# Altium PCB MecaVac.PcbDoc (part 1 of 2)
Units mm, origin at the board's own origin, x right, y up, seen from the top; angles counter-clockwise.
Board outline 120 x 80 mm, 2 copper layers (Top Layer, Bottom Layer), stack 1.56 mm thick; 93 components, 53 nets, 292 pads, 63 vias.
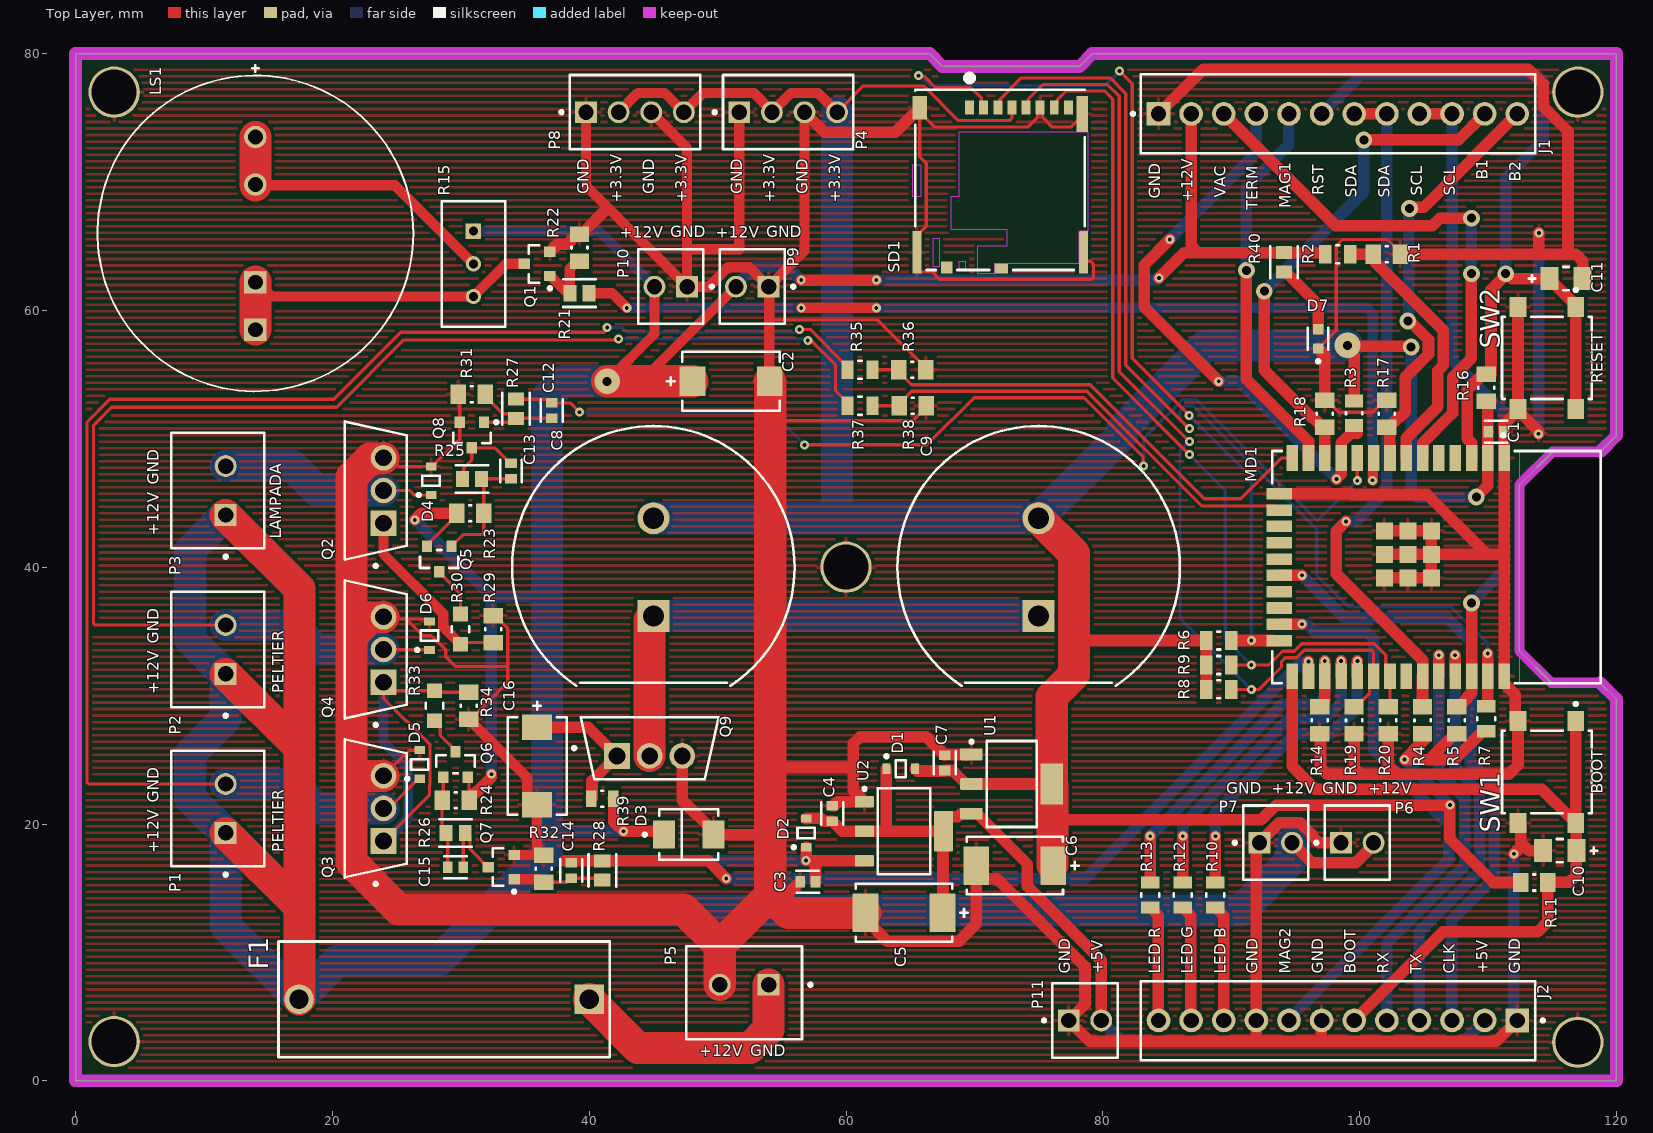
[diagram p0: Top Layer view]
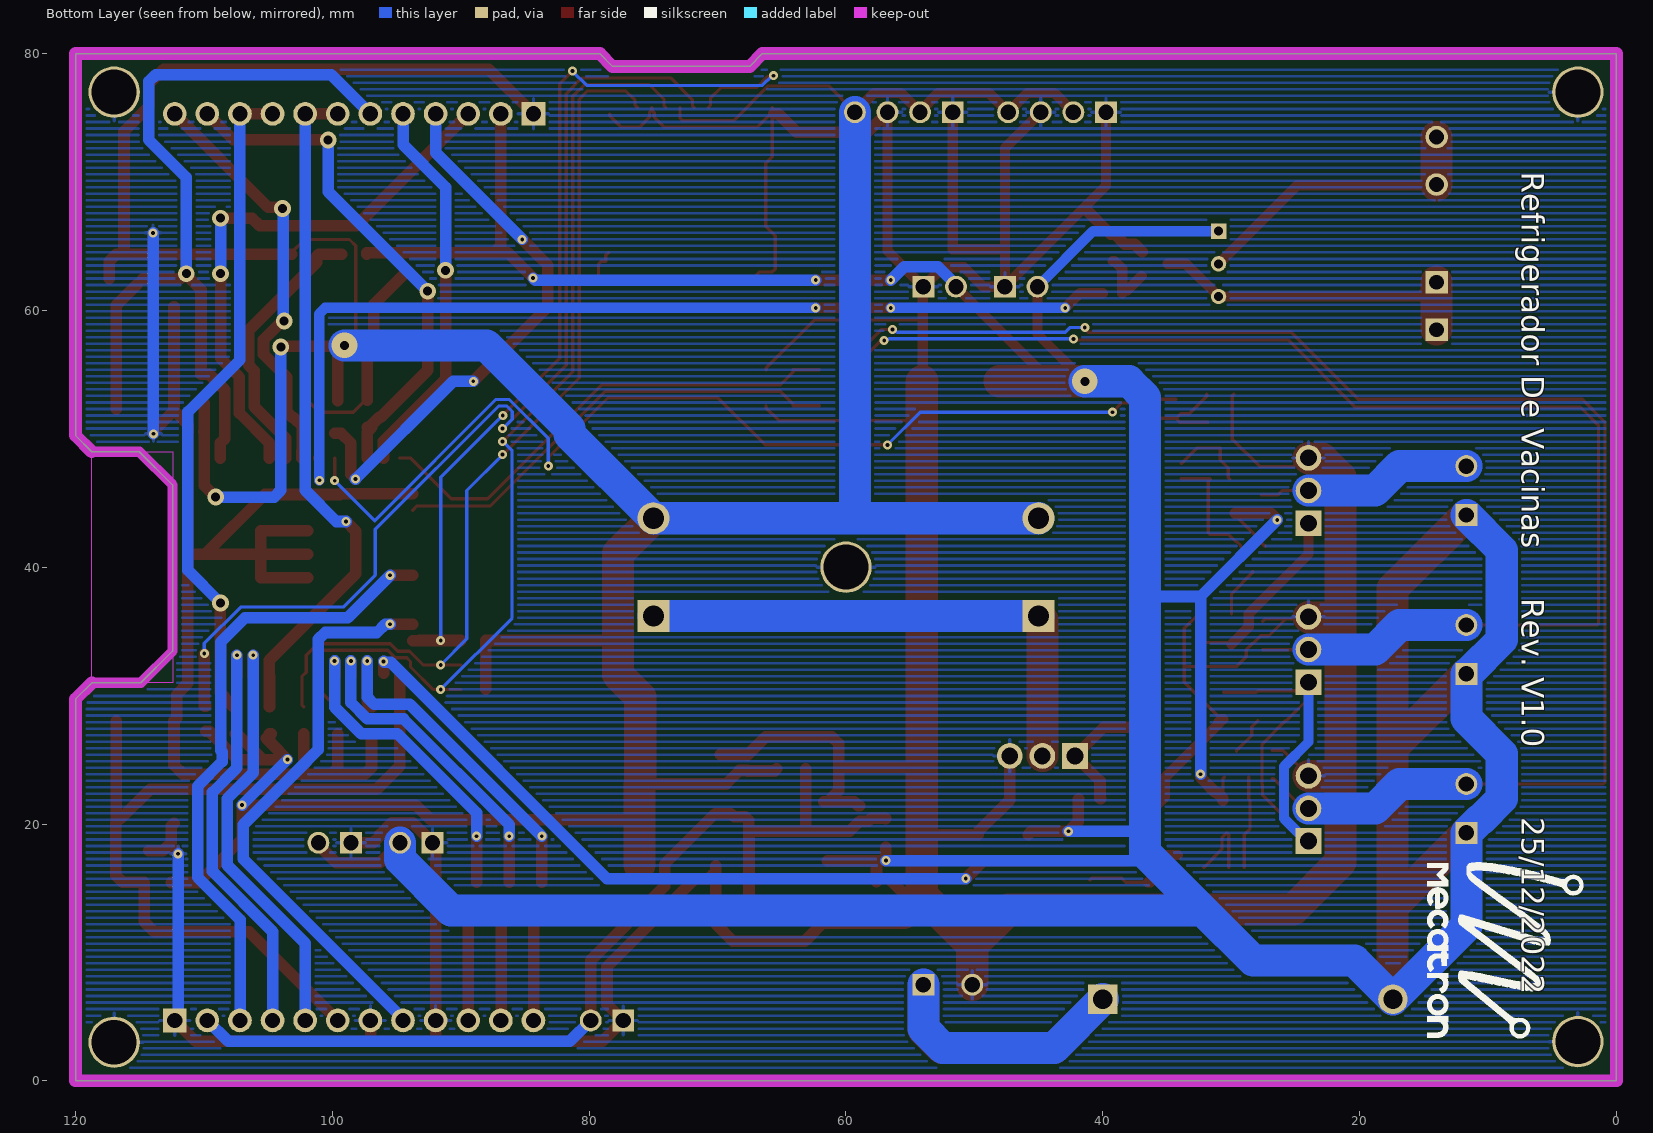
[diagram p1: Bottom Layer view, seen from below]
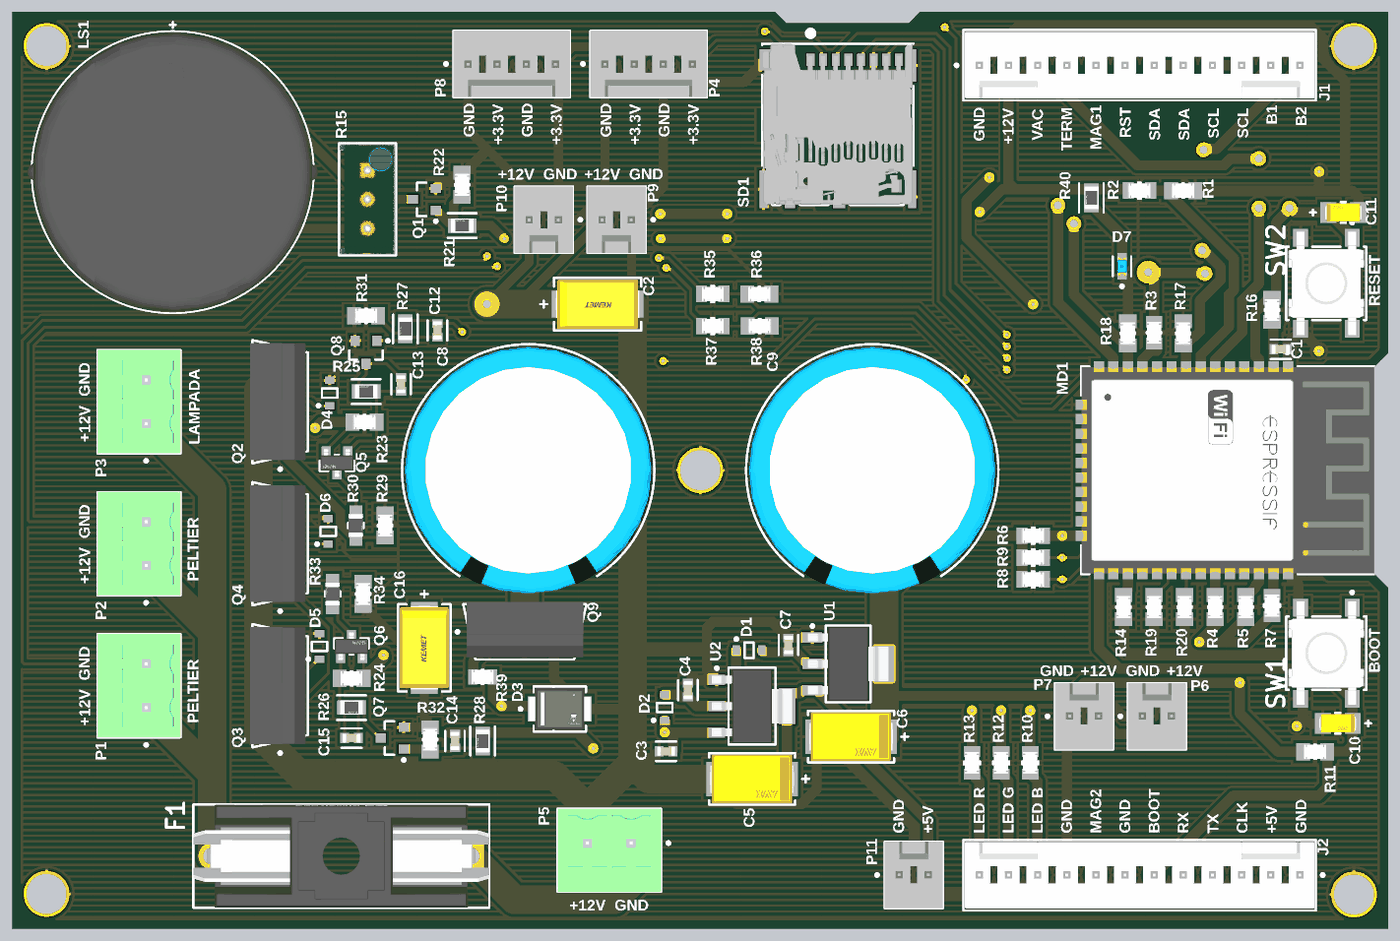
[diagram p3: 3D render of the assembled board from above, using the file's embedded part models]

## Layer stack, top to bottom
Top Solder: solder mask 0.02, Solder Resist, Dk 3.5
Top Layer: signal copper 0.3
Dielectric 1: dielectric 0.96, FR-4, Dk 4.8
Bottom Layer: signal copper 0.3
Bottom Solder: solder mask 0.02, Solder Resist, Dk 3.5

## Board outline
112.45,33.473 114.923,31 118.733,31 120,29.733 120,0 0,0 0,80 66.523,80 67.494,79 78.194,79 79.172,80 120,80 120,50.25 118.75,49 115.04,49 112.45,46.41

## Design rules (kind name [scope] priority, off if disabled: settings)
Clearance [All] p1: gap=0.254 ignorepadtopadclearanceinfootprint=FALSE except(0: Arc-Hole Track-Hole SMDPad-Hole THPad-Hole Via-Hole Fill-Hole Poly-Hole Region-Hole Text-Hole)
PolygonConnect [All] p1: connectstyle=Relief reliefconductorwidth=0.254 reliefentries=4 polygonreliefangle="90 Angle" airgapwidth=0.254
RoutingVias [All] p1: holewidth=1 width=1.3 viastyle="Through Hole" minholewidth=0.3 minwidth=0.7 maxholewidth=2 maxwidth=3
SolderMaskExpansion [All] p1: expansion=0.102 istentingtop=FALSE
Width [All] p1: maxlimit=2.5 minlimit=0.254 preferedwidth=0.9 minimp=50.000000 maximp=50.000000 favimp=50.000000
30 further rules are at their usual default settings.

## Components (designator, comment, footprint, x,y, rotation, side; value= is the part's Value field where it differs from the comment)
C1 "C0603C471J5GACTU" FP-C0603C-CF-MFG 110.617,50.546 r0 top value="470 pF"
C2 "T491D476K025AT" FP-T491D476K025AT-MFG 51.054,54.483 r180 top
C3 "C0603C471J5GACTU" FP-C0603C-CF-MFG 57.023,15.494 r180 top value="470 pF"
C4 "C0603C471J5GACTU" FP-C0603C-CF-MFG 58.928,20.828 r90 top value="470 pF"
C5 "47uF" FP-TAJD-MFG 64.516,13.081 r0 top
C6 "47uF" FP-TAJD-MFG 73.152,16.764 r0 top
C7 "C0603C471J5GACTU" FP-C0603C-CF-MFG 67.691,24.765 r90 top value="470 pF"
C8 "Super Capacitor 1F 5.5V" FP-FR0H105ZF-MFG 45,40 r90 top value=1F
C9 "1F" FP-FR0H105ZF-MFG 75,40 r90 top
C10 "TAJA104K035RNJ" FP-TAJA-MFG 115.595,17.932 r0 top
C11 "TAJA104K035RNJ" FP-TAJA-MFG 116.078,62.484 r180 top
C12 "C0603C471J5GACTU" FP-C0603C-CF-MFG 37.084,52.197 r270 top value="470 pF"
C13 "C0603C471J5GACTU" FP-C0603C-CF-MFG 33.909,47.498 r90 top value="470 pF"
C14 "C0603C471J5GACTU" FP-C0603C-CF-MFG 38.608,16.383 r270 top value="470 pF"
C15 "C0603C471J5GACTU" FP-C0603C-CF-MFG 29.591,16.637 r0 top value="470 pF"
C16 "T491D476K025AT" FP-T491D476K025AT-MFG 35.941,24.511 r90 top
D1 "BAT54HT1G" ONSC-SOD-323-2-477-02_V 64.262,24.307 r0 top
D2 "BAT54HT1G" ONSC-SOD-323-2-477-02_V 56.896,19.304 r90 top
D3 "TVS-15V" FP-95401-MFG 47.752,19.177 r0 top
D4 "BAT54HT1G" ONSC-SOD-323-2-477-02_V 27.686,46.736 r90 top
D5 "BAT54HT1G" ONSC-SOD-323-2-477-02_V 26.797,24.638 r90 top
D6 "BAT54HT1G" ONSC-SOD-323-2-477-02_V 27.559,34.671 r90 top
D7 "LTST-C191TBKT" FP-LTST-C191TBKT-MFG 96.774,57.785 r90 top
F1 "64600001223" FP-64600001223-MFG 28.702,6.35 r180 top
J1 "22-27-2121" FP-22-27-2121-MFG 98.313,75.331 r180 top
J2 "22-27-2121" FP-22-27-2121-MFG 98.313,4.679 r0 top
LS1 "PKB24SPCH3601-B0" FP-PKB24SPCH3601-B0-MFG 14,66 r90 top
MD1 "ESP32-WROOM-32D" FP-ESP32-WROOM-32D-MFG 106,40 r270 top
P1 "Peltier 1" PHOE-1803426_V 11.684,21.209 r90 top
P2 "Peltier 2" PHOE-1803426_V 11.684,33.591 r90 top
P3 "Lâmpada" PHOE-1803426_V 11.684,45.974 r90 top
P4 "22-27-2041" MOLX-22-27-2041_V 55.499,75.438 r180 top
P5 "Power" PHOE-1803426_V 52.07,7.483 r180 top
P6 "22-27-2021" MOLX-22-27-2021_V 99.822,18.542 r0 top
P7 "22-27-2021" MOLX-22-27-2021_V 93.472,18.542 r0 top
P8 "22-27-2041" MOLX-22-27-2041_V 43.561,75.438 r180 top
P9 "22-27-2021" MOLX-22-27-2021_V 52.705,61.849 r180 top
P10 "22-27-2021" MOLX-22-27-2021_V 46.355,61.849 r180 top
P11 "22-27-2021" MOLX-22-27-2021_V 78.613,4.699 r0 top
Q1 "BC846BLT1G" ONSC-SOT-23-3-318-08_V 35.941,63.627 r180 top
Q2 "IRF1404PBF" FP-PG-TO220-3-MFG 23.368,45.974 r180 top
Q3 "IRF1404PBF" FP-PG-TO220-3-MFG 23.368,21.209 r180 top
Q4 "IRF1404PBF" FP-PG-TO220-3-MFG 23.368,33.591 r180 top
Q5 "BC807-40-7-F" FP-SOT23-MFG 28.321,40.64 r270 top
Q6 "BC807-40-7-F" FP-SOT23-MFG 29.591,24.638 r90 top
Q7 "BC846BLT1G" ONSC-SOT-23-3-318-08_V 33.147,16.637 r180 top
Q8 "BC846BLT1G" ONSC-SOT-23-3-318-08_V 30.861,50.292 r270 top
Q9 "IRF1404PBF" FP-PG-TO220-3-MFG 44.704,25.908 r90 top
R1 "CRCW080510K0FKEA" FP-CRCW0805-e3-IPC_A 102.108,64.389 r0 top
R2 "CRCW0805100KFKEA" FP-CRCW0805-e3-MFG 98.298,64.389 r0 top
R3 "CRCW08054K70FKEA" FP-CRCW0805-e3-IPC_B 99.568,51.997 r270 top
R4 "CRCW080510K0FKEA" FP-CRCW0805-e3-IPC_A 104.902,28.067 r90 top
R5 "CRCW080510K0FKEA" FP-CRCW0805-e3-IPC_A 107.569,28.067 r90 top
R6 "CRCW080547K0FKEA" FP-CRCW0805-e3-MFG 89.027,34.29 r0 top
R7 "CRCW080547K0FKEA" FP-CRCW0805-e3-MFG 109.855,28.194 r90 top
R8 "CRCW080547K0FKEA" FP-CRCW0805-e3-MFG 89.027,30.48 r0 top
R9 "CRCW080547K0FKEA" FP-CRCW0805-e3-MFG 89.027,32.385 r0 top
R10 "CRCW0805220RFKEA" FP-CRCW0805-e3-MFG 88.773,14.478 r270 top
R11 "CRCW080510K0FKEA" FP-CRCW0805-e3-IPC_A 113.614,15.443 r180 top
R12 "CRCW0805220RFKEA" FP-CRCW0805-e3-MFG 86.233,14.478 r270 top
R13 "CRCW0805220RFKEA" FP-CRCW0805-e3-MFG 83.693,14.478 r270 top
R14 "CRCW080510K0FKEA" FP-CRCW0805-e3-IPC_A 96.901,28.067 r90 top
R15 "3296W-1-202LF" FP-3296W-MFG 30.988,63.627 r180 top
R16 "CRCW080510K0FKEA" FP-CRCW0805-e3-IPC_A 109.855,53.975 r270 top
R17 "CRCW080510K0FKEA" FP-CRCW0805-e3-IPC_A 102.108,51.943 r270 top
R18 "CRCW080510K0FKEA" FP-CRCW0805-e3-IPC_A 97.282,51.943 r270 top
R19 "CRCW080510K0FKEA" FP-CRCW0805-e3-IPC_A 99.568,28.067 r90 top
R20 "CRCW080510K0FKEA" FP-CRCW0805-e3-IPC_A 102.235,28.067 r90 top
R21 "ERA6AEB102V" FP-ERA6A-IPC_C 39.243,61.341 r180 top
R22 "CRCW080510K0FKEA" FP-CRCW0805-e3-IPC_A 39.243,64.897 r90 top
R23 "CRCW080510K0FKEA" FP-CRCW0805-e3-IPC_A 30.734,44.196 r0 top
R24 "CRCW080510K0FKEA" FP-CRCW0805-e3-IPC_A 29.591,21.844 r180 top
R25 "ERA6AEB102V" FP-ERA6A-IPC_C 30.872,46.863 r180 top
R26 "ERA6AEB102V" FP-ERA6A-IPC_C 29.591,19.304 r0 top
R27 "ERA6AEB102V" FP-ERA6A-IPC_C 34.29,52.335 r270 top
R28 "ERA6AEB102V" FP-ERA6A-IPC_C 41.021,16.383 r270 top
R29 "CRCW080510K0FKEA" FP-CRCW0805-e3-IPC_A 32.512,35.179 r90 top
R30 "ERJ-6GEYJ151V" FP-ERJ6GE-MFG 29.972,35.179 r270 top value=150Ω
R31 "CRCW080510K0FKEA" FP-CRCW0805-e3-IPC_A 30.861,53.467 r0 top
R32 "CRCW080510K0FKEA" FP-CRCW0805-e3-IPC_A 36.449,16.51 r270 top
R33 "ERJ-6GEYJ151V" FP-ERJ6GE-MFG 27.94,29.21 r90 top value=150Ω
R34 "CRCW080510K0FKEA" FP-CRCW0805-e3-IPC_A 30.607,29.21 r270 top
R35 "CRCW0805100KFKEA" FP-CRCW0805-e3-MFG 61.087,55.372 r0 top
R36 "CRCW080510K0FKEA" FP-CRCW0805-e3-IPC_A 65.151,55.372 r0 top
R37 "CRCW0805100KFKEA" FP-CRCW0805-e3-MFG 61.087,52.578 r0 top
R38 "CRCW080510K0FKEA" FP-CRCW0805-e3-IPC_A 65.186,52.578 r0 top
R39 "CRCW0805220KFKEA" FP-CRCW0805-e3-IPC_C 41.021,21.971 r0 top
R40 "ERA6AEB102V" FP-ERA6A-IPC_C 94.107,63.754 r270 top
SD1 "503398-1892" MOLX-503398-1892_V 72,69.53 r0 top
SW1 "BOOT" FP-B3S-1000P-MFG 114.59,24.046 r270 top
SW2 "RESET" FP-B3S-1000P-MFG 114.59,56.299 r270 top
U1 "LM1117IMP-3.3/NOPB" DCY0004A_N 72.898,23.114 r0 top
U2 "LM1117MPX-5.0/NOPB" DCY0004A_L 64.516,19.431 r0 top

## Footprints (in the part's own frame and the unit in brackets; to place one, negate y for a bottom-side part, rotate by r counter-clockwise, add the part's x,y. Pads: shape width x height; smd on the part's side, far side on the other; paste and mask are expansions set on the pad)
DCY0004A_L [mm] "SOT223, 4-Leads, Body 6.7x3.7mm, Pitch 2.3mm, IPC High Density"
  rrect11% 1.45x0.9 smd: 1(-3.075,2.3) 2(-3.075,0) 3(-3.075,-2.3)
  rrect7% 1.45x3.15 smd: 4(3.075,0)
  silkscreen extent -3.2,-3.35 2.05,3.42, body extent -3.5,-3.25 3.5,3.25, height 1.62
DCY0004A_N [mm] "SOT223, 4-Leads, Body 6.7x3.7mm, Pitch 2.3mm, IPC Medium Density"
  rrect11% 1.75x0.9 smd: 1(-3.125,2.3) 2(-3.125,0) 3(-3.125,-2.3)
  rrect6% 1.75x3.2 smd: 4(3.125,0)
  silkscreen extent -3.25,-3.35 1.95,3.42, body extent -3.5,-3.25 3.5,3.25, height 1.62
FP-22-27-2121-MFG [mm]
  rect 1.84x1.84 hole 1.19 paste-1000 mask+0: 1(13.97,0.02)
  round 1.84 hole 1.19 paste-1000 mask+0: 2(11.43,0.02) 3(8.89,0.02) 4(6.35,0.02) 5(3.81,0.02) 6(1.27,0.02) 7(-1.27,0.02) 8(-3.81,0.02) 9(-6.35,0.02) 10(-8.89,0.02) 11(-11.43,0.02) 12(-13.97,0.02)
  silkscreen extent -15.37,-3.08 16.09,3.08, body extent -15.47,-3.18 15.47,3.18, height 0.25
FP-3296W-MFG [mm]
  rect 1.2x1.2 hole 0.7 paste-1000 mask+0: 1(0.005,-2.54)
  round 1.2 hole 0.7 paste-1000 mask+0: 2(0.005,0) 3(0.005,2.54)
  silkscreen extent -2.48,-4.89 2.48,4.89, body extent -2.58,-4.99 2.58,4.99, height 0.25
FP-95401-MFG [mil]
  rect 67.5x86 smd paste+0 mask+0: 1(-76.25,0) 2(76.25,0)
  silkscreen extent -140,-78 90,78, body extent -114,-81 114,81, height 10
FP-64600001223-MFG [mm]
  rect 2.3x2.3 hole 1.5 paste-1000 mask+0: 1(-11.3,0)
  round 2.3 hole 1.5 paste-1000 mask+0: 2(11.3,0)
  silkscreen extent -12.9,-4.5 12.9,4.5, body extent -13,-4.6 13,4.6, height 0.25
FP-B3S-1000P-MFG [mm]
  rect 1.55x1.3 smd paste+0 mask+0: 1(-3.975,2.25) 2(3.975,2.25) 3(-3.975,-2.25) 4(3.975,-2.25)
  silkscreen extent -5.42,-3.5 3.2,3.5, body extent -4.85,-3.6 4.85,3.6, height 0.25
FP-C0603C-CF-MFG [mm]
  rect 0.75x0.9 smd paste+0 mask+0: 1(-0.6,0) 2(0.6,0)
  silkscreen extent -0.87,-0.85 0.88,0.85, body extent -1.2,-0.6 1.2,0.6, height 0.25
FP-CRCW0805-e3-IPC_A [mil]
  rect 47.5x59.38 smd paste+0 mask+0: 1(-41.37,0) 2(41.37,0)
  silkscreen extent -3,-25 3,25, body extent -85,-49 85,49, height 10
FP-CRCW0805-e3-IPC_B [mm]
  rect 1.007x1.408 smd paste+0 mask+0: 1(-0.951,0) 2(0.951,0)
  silkscreen extent -0.07,-0.63 0.07,0.63, body extent -1.7,-0.95 1.7,0.95, height 0.25
FP-CRCW0805-e3-IPC_C [mil]
  rect 31.75x51.5 smd paste+0 mask+0: 1(-33.5,0) 2(33.5,0)
  silkscreen extent -3,-25 3,25, body extent -53,-31 53,31, height 10
FP-CRCW0805-e3-MFG [mm]
  rect 0.95x1.45 smd paste+0 mask+0: 1(-0.975,0) 2(0.975,0)
  silkscreen extent -0.13,-0.7 0.13,0.7, body extent -1.55,-0.82 1.55,0.82, height 0.25
FP-ERA6A-IPC_C [mm]
  rect 1.005x1.262 smd paste+0 mask+0: 1(-0.751,0) 2(0.751,0)
  silkscreen extent -1.25,-1.07 1.25,1.07, body extent -1.35,-0.77 1.35,0.77, height 0.25
FP-ERJ6GE-MFG [mm]
  rect 1.15x1.15 smd paste+0 mask+0: 1(-1.175,0) 2(1.175,0)
  silkscreen extent -0.23,-0.67 0.22,0.67, body extent -1.85,-0.77 1.85,0.77, height 0.25
FP-ESP32-WROOM-32D-MFG [mm]
  rect 2x0.9 smd paste+0 mask+0: 1(-8.5,5.26) 2(-8.5,3.99) 3(-8.5,2.72) 4(-8.5,1.45) 5(-8.5,0.18) 6(-8.5,-1.09) 7(-8.5,-2.36) 8(-8.5,-3.63) 9(-8.5,-4.9) 10(-8.5,-6.17) 11(-8.5,-7.44) 12(-8.5,-8.71) 13(-8.5,-9.98) 14(-8.5,-11.25) 25(8.5,-11.25) 26(8.5,-9.98) 27(8.5,-8.71) 28(8.5,-7.44) 29(8.5,-6.17) 30(8.5,-4.9) 31(8.5,-3.63) 32(8.5,-2.36) 33(8.5,-1.09) 34(8.5,0.18) 35(8.5,1.45) 36(8.5,2.72) 37(8.5,3.99) 38(8.5,5.26)
  rect 0.9x2 smd paste+0 mask+0: 15(-5.715,-12.25) 16(-4.445,-12.25) 17(-3.175,-12.25) 18(-1.905,-12.25) 19(-0.635,-12.25) 20(0.635,-12.25) 21(1.905,-12.25) 22(3.175,-12.25) 23(4.445,-12.25) 24(5.715,-12.25)
  rect 1.33x1.33 smd paste+0 mask+0: 39(-2.835,-0.405) 39(-2.835,-2.24) 39(-2.835,-4.075) 39(-1,-0.405) 39(-1,-2.24) 39(-1,-4.075) 39(0.835,-0.405) 39(0.835,-2.24) 39(0.835,-4.075)
  Keep-Out Layer region: -9,6.45 9,6.45 9,12.75 -9,12.75
  Keep-Out Layer region: -9,6.45 9,6.45 9,12.75 -9,12.75
  silkscreen extent -10.4,-12.8 9.05,12.8, body extent -9.6,-13.35 9.6,12.9, height 0.25
FP-FR0H105ZF-MFG [mm]
  rect 2.5x2.5 hole 1.65 paste-1000 mask+0: 1(-3.81,0)
  round 2.5 hole 1.65 paste-1000 mask+0: 2(3.81,0)
  silkscreen extent -9.23,-11 11,11, body extent -11.1,-11.1 11.1,11.1, height 0.25
FP-LTST-C191TBKT-MFG [mm]
  rect 0.8x0.8 smd paste+0 mask+0: 1(-0.75,0) 2(0.75,0)
  silkscreen extent -1.87,-0.8 0.85,0.8, body extent -1.25,-0.55 1.25,0.55, height 0.25
FP-PG-TO220-3-MFG [mm]
  rect 2x2 hole 1.3 paste-1000 mask+0: 1(-0.61,2.54)
  round 2 hole 1.3 paste-1000 mask+0: 2(-0.61,0) 3(-0.61,-2.54)
  silkscreen extent -2.41,-5.38 2.41,6, body extent -2.51,-5.6 2.51,5.6, height 0.25
FP-PKB24SPCH3601-B0-MFG [mm]
  rect 1.75x1.75 hole 1.15 paste-1000 mask+0: 1(-7.5,0)
  round 1.75 hole 1.15 paste-1000 mask+0: 2(7.5,0)
  silkscreen extent -12.3,-12.3 13.1,12.3, body extent -12.4,-12.4 12.4,12.4, height 0.25
FP-SOT23-MFG [mm]
  rect 0.9x0.8 smd paste+0 mask+0: 1(-1,0.95) 2(-1,-0.95) 3(1,0)
  silkscreen extent -0.7,-1.5 0.7,1.5, body extent -1.55,-1.6 1.55,1.6, height 0.25
FP-T491D476K025AT-MFG [mm]
  rect 1.99x2.33 smd paste+0 mask+0: 1(-3.01,0) 2(3.01,0)
  silkscreen extent -3.8,-2.3 5,2.3, body extent -4.13,-2.42 4.13,2.42, height 0.25
FP-TAJA-MFG [mm]
  rect 1.4x1.8 smd paste+0 mask+0: 1(-1.3,0) 2(1.3,0)
  silkscreen extent -0.23,-0.9 2.9,0.9, body extent -2.1,-1 2.1,1, height 0.25
FP-TAJD-MFG [mm]
  rect 2x3 smd paste+0 mask+0: 1(-3,0) 2(3,0)
  silkscreen extent -3.75,-2.25 4.97,2.25, body extent -4.1,-2.35 4.1,2.35, height 0.25
MOLX-22-27-2021_V [mm] "Header, 2-Leads, Body 5.8x5.08mm"
  rect 1.7x1.7 hole 1.19: 1(-1.27,0)
  round 1.7 hole 1.19: 2(1.27,0)
  silkscreen extent -3.31,-2.9 2.54,2.9, body extent -2.54,-2.9 2.54,2.9, height 11.72
MOLX-22-27-2041_V [mm] "CONN, 4-Leads, Body 10.16x5.8mm, Pitch 2.54mm"
  rect 1.7x1.7 hole 1.19: 1(3.81,0)
  round 1.7 hole 1.19: 2(1.27,0) 3(-1.27,0) 4(-3.81,0)
  silkscreen extent -5.08,-2.9 5.85,2.9, body extent -5.08,-2.9 5.08,2.9, height 11.7
MOLX-503398-1892_V [mm] "CONN, 8-Leads, Body 14.05x13.2mm, Pitch 1.1mm"
  rect 0.7x1.1 smd: 1(-2.38,6.27) 2(-1.28,6.27) 3(-0.18,6.27) 4(0.92,6.27) 5(2.02,6.27) 6(3.12,6.27) 7(4.22,6.27) 8(5.32,6.27)
  rect 1.05x0.78 smd: 9(0.095,-6.27)
  rect 0.9x0.93 smd: 10(-4.17,-6.195)
  rect 0.86x2.8 smd: 11(6.4,5.77)
  rect 0.7x3.3 smd: 12(6.48,-5.01) 13(-6.48,-5.01)
  rect 1.14x1.83 smd: 14(-6.26,6.255)
  Top Layer keep-out region: -3.22,-6.28 -2.67,-6.28 -2.67,-5.73 -3.22,-5.73
  Top Layer keep-out region: -5.235,-6.08 -4.685,-6.08 -4.685,-3.93 -5.235,-3.93
  Top Layer keep-out region: -6.83,-0.63 -6.13,-0.63 -6.13,1.77 -6.83,1.77
  Top Layer keep-out region: 6.83,4.37 6.83,-3.36 6.13,-3.36 6.13,-5.88 -0.43,-5.88 -0.43,-6.66 -1.73,-6.66 -1.73,-4.48 0.57,-4.48 0.57,-3.23 -3.82,-3.23 -3.82,-0.63 -3.17,-0.63 -3.17,4.37
  silkscreen extent -6.6,-6.38 6.6,8.82, body extent -6.55,-6.38 6.55,7.67, height 1.28
ONSC-SOD-323-2-477-02_V [mm] "SOD, 2-Leads, Body 1.7x1.25mm"
  rect 0.63x0.83 smd: 1(-1.115,0) 2(1.115,0)
  silkscreen extent -1.24,-0.67 0.4,1.09, body extent -0.85,-0.63 0.85,0.63, height 1.06
ONSC-SOT-23-3-318-08_V [mm] "SOT23, 3-Leads, Body 2.92x1.3mm, Pitch 0.95mm"
  rect 0.9x0.8 smd: 1(-1,0.95) 2(-1,-0.95) 3(1,0)
  silkscreen extent -1.13,-1.46 0.65,2.02, body extent -0.65,-1.46 0.65,1.46, height 1.11
PHOE-1803426_V [mm] "THD, 2-Leads, Body 9.01x7.25mm, Pitch 3.81mm"
  rect 1.7x1.7 hole 1.2: 1(-1.905,0)
  round 1.7 hole 1.2: 2(1.905,0)
  silkscreen extent -5.28,-3 4.5,4.25, body extent -4.5,-3 4.51,4.25, height 9.2

## Part data
C1 C7: library part CMP-2006-03581-2, "CAP CER 470PF 50V 5% NP0 0603", Capacitance="470 pF", Capacitancia=470pF, Manufacturer=KEMET, Package=C0603C-CF, Temperature="-55°C to +125°C", Temperature Characteristic=C0G, Temperature Coefficient=30ppm/°C, Temperature Range High=+125°C, Temperature Range Low=-55°C, Tolerance=0.05, Voltage rating="50 V", Automotive=Yes, Automotive Grade="Grade 1", Category=Cap, ComponentLink2Description=Datasheet, ComponentLink2URL=https://api.kemet.com/component-edge/download/datasheet/C0603C100J5GACAUTO.pdf, Device Class L1="Passive Components", Device Class L2=Capacitors, Device Class L3="Ceramic Capacitors", Digikey Description="CAP CER 470PF 50V 5% NP0 0603", Height=0.87mm, Lead Free=Yes, Manufacturer Part Number=C0603C471J5GACTU, Material=Ceramic, Mouser Description="Ceramic Capacitor 470Pf 50V, C0G, 5%, 0603, Full Reel", Octopart=https://octopart.com/c0603c471j5gactu-kemet-95298, RoHS=TRUE
C2 C16: library part CMP-03017-000020-1, "CAP TANT 47UF 10% 25V 2917", Capacitance=47uF, Case Code (Imperial)=2917, Case Code (Metric)=7343, Dielectric Material=Tantalum, ESR (Equivalent Series Resistance)=700mR, Leakage Current=11.8uA, Max Operating Temperature=125°C, Min Operating Temperature=-55°C, Package Quantity=1, Ripple Current=463mA, Tolerance=10%, Voltage=25V, Case/Package=2917, Depth=4.3mm, Dissipation Factor=10%, Failure Rate=0.001%, Features="General Purpose", Height=2.8mm, Height - Seated (Max)=0.122inch, Lead Free="Lead Free", Length=7.3mm, Life (Hours)=2000Hour, Mount="Surface Mount", Number of Pins=2, Packaging="Tape and Reel", Polarity=Polar, Radiation Hardening=No, REACH SVHC="No SVHC", RoHS Compliant=Yes, Termination=SMD/SMT, Voltage rating=25V, Voltage Rating (DC)=25V, Weight=0.023634oz, Width=4.3mm
C3 C4 C12 C13 C14 C15: library part CMP-2006-03581-2, "CAP CER 470PF 50V 5% NP0 0603", Capacitance="470 pF", Manufacturer=KEMET, Package=C0603C-CF, Temperature="-55°C to +125°C", Temperature Characteristic=C0G, Temperature Coefficient=30ppm/°C, Temperature Range High=+125°C, Temperature Range Low=-55°C, Tolerance=0.05, Voltage rating="50 V", Automotive=Yes, Automotive Grade="Grade 1", Category=Cap, ComponentLink2Description=Datasheet, ComponentLink2URL=https://api.kemet.com/component-edge/download/datasheet/C0603C100J5GACAUTO.pdf, Device Class L1="Passive Components", Device Class L2=Capacitors, Device Class L3="Ceramic Capacitors", Digikey Description="CAP CER 470PF 50V 5% NP0 0603", Height=0.87mm, Lead Free=Yes, Manufacturer Part Number=C0603C471J5GACTU, Material=Ceramic, Mouser Description="Ceramic Capacitor 470Pf 50V, C0G, 5%, 0603, Full Reel", Octopart=https://octopart.com/c0603c471j5gactu-kemet-95298, RoHS=TRUE
C5 C6: library part CMP-04424-000452-1, "47uF 10V  ±10% 400mΩ 2917  SMD Tantalum Capacitor", Case Code (Imperial)=2917, Case Code (Metric)=7343, Dielectric Material=Tantalum, ESR (Equivalent Series Resistance)=900mR, Leakage Current=6uA, Max Operating Temperature=125°C, Min Operating Temperature=-55°C, Package Quantity=1, Tolerance=10%, Voltage=10V, Capacitance=47uF, Case/Package=2917, Construction=Flat, Depth=4.3mm, Dissipation Factor=6%, Features="General Purpose", Height=2.9mm, Height - Seated (Max)=0.122inch, Lead Free="Lead Free", Lead Pitch=4.4mm, Length=7.3mm, Mount="Surface Mount", Number of Pins=2, Packaging="Tape and Reel", Polarity=Polar, Radiation Hardening=No, REACH SVHC="No SVHC", RoHS Compliant=Yes, Series=TAJ, Termination=SMD/SMT, Voltage rating=10V, Voltage Rating (DC)=10V, Width=0.169inch
C8: library part CMP-03024-000003-1, "CAP 1F -20% +80% 5.5V T/H", Capacitance=1F, Manufacturer=KEMET, Manufacturer Part Number=FR0H105ZF, Temperature="-40°C to +85°C", Temperature Range High=+85°C, Temperature Range Low=-40°C, Tolerance=-20/+80%, Voltage rating=5.5V, Automotive=No, Category=Cap, ComponentLink2Description=Datasheet, ComponentLink2URL=https://content.kemet.com/datasheets/KEM_S6016_FR.pdf, Device Class L1="Passive Components", Device Class L2=Capacitors, Device Class L3=Supercapacitors, Digikey Description="CAP 1F -20% +80% 5.5V T/H", Height=22mm, Lead Free=Yes, Mouser Description="Supercapacitors / Ultracapacitors 1F 5.5volts Radial Super Cap", Octopart=https://octopart.com/fr0h105zf-kemet-30531656, Package=FR0H105ZF, RoHS=TRUE
C9: library part CMP-03024-000003-1, "CAP 1F -20% +80% 5.5V T/H", Manufacturer=KEMET, Manufacturer Part Number=FR0H105ZF, Temperature="-40°C to +85°C", Temperature Range High=+85°C, Temperature Range Low=-40°C, Tolerance=-20/+80%, Voltage rating=5.5V, Automotive=No, Capacitance=1F, Category=Cap, ComponentLink2Description=Datasheet, ComponentLink2URL=https://content.kemet.com/datasheets/KEM_S6016_FR.pdf, Device Class L1="Passive Components", Device Class L2=Capacitors, Device Class L3=Supercapacitors, Digikey Description="CAP 1F -20% +80% 5.5V T/H", Height=22mm, Lead Free=Yes, Mouser Description="Supercapacitors / Ultracapacitors 1F 5.5volts Radial Super Cap", Octopart=https://octopart.com/fr0h105zf-kemet-30531656, Package=FR0H105ZF, RoHS=TRUE
C10 C11: library part CMP-04424-000673-1, "100nF 35V  ±10% 24Ω 1206  SMD Tantalum Capacitor", Capacitance=100nF, Case Code (Imperial)=1206, Case Code (Metric)=3216, Dielectric Material=Tantalum, ESR (Equivalent Series Resistance)=24R, Leakage Current=500nA, Max Operating Temperature=125°C, Min Operating Temperature=-55°C, Package Quantity=1, Tolerance=10%, Voltage=35V, Case/Package=1206, Construction=Flat, Depth=1.6mm, Dissipation Factor=4%, Features="General Purpose", Height=1.6mm, Height - Seated (Max)=0.071inch, Lead Free="Lead Free", Lead Pitch=1.1mm, Length=3.2mm, Mount="Surface Mount", Number of Pins=2, Packaging="Tape and Reel", Polarity=Polar, Q Factor=4, Radiation Hardening=No, REACH SVHC="No SVHC", RoHS Compliant=Yes, Series=TAJ, Termination=SMD/SMT, Voltage rating=35V, Voltage Rating (DC)=35V, Width=1.6mm
D1 D2 D4 D5 D6: library part CMP-1055-00462-1, "Schottky Barrier Diode, 2-Pin SOD-323, Pb-Free, Tape and Reel", Manufacturer="On Semiconductor", ComponentLink1Description="Manufacturer URL", ComponentLink1URL=http://www.onsemi.com/, ComponentLink2Description=Datasheet, ComponentLink2URL=http://www.onsemi.cn/pub_link/Collateral/BAT54HT1-D.PDF, ComponentLink3Description="Package Specification", ComponentLink3URL=http://www.onsemi.com/pub_link/Collateral/477-02.PDF.1, Configuration=Single, DatasheetVersion="Rev. 6", IFSM Max (A)=0.6, Mounting Technology="Surface Mount", PackageDescription="2-Pin SOD, Body 1.7 x 1.25 mm", PackageReference=SOD-323-2-477-02, PackageVersion="Rev. H, 03/2007", Packing="Tape and Reel", PartNumber=BAT54HT1G, RoHS=TRUE, trr Max (ns)=5
D3: library part CMP-02577-000009-1, "TVS DIODE 15V 24.4V DO214AA", Breakdown Voltage=16.7V, Clamping Voltage=24.4V, Manufacturer=Vishay, Manufacturer Part Number=SMBJ15A-E3/52, Max Junction Temp=+150°C, Package=95401, Peak Pulse Current=24.6A, Peak Pulse Power=600W, Reverse Standoff Voltage=15V, Temperature="-55°C to +150°C", Temperature Range Low=-55°C, Automotive=No, Category=Diode, ComponentLink2Description=Datasheet, ComponentLink2URL=https://www.vishay.com/docs/88392/smbj.pdf, Device Class L1="Circuit Protection", Device Class L2="TVS Diodes", Device Class L3=unset, Digikey Description="TVS DIODE 15V 24.4V DO214AA", Direction=Unidirectional, Footprint Url=https://www.vishay.com/docs/95401/smb.pdf, Height=2.44mm, Lead Free=Yes, Mouser Description="TVS Diodes - Transient Voltage Suppressors 600W 15V 5% Uni", Number Of Channels=1, Octopart=https://octopart.com/smbj15a-e3%2F52-vishay-39558613, RoHS=TRUE, Standoff Height=0mm, Temperature Range High=+150°C
D7: library part CMP-22017-000008-1, "LED BLUE CLEAR CHIP SMD", Case Code (Imperial)=0603, Case Code (Metric)=1608, Color=Blue, Forward Current=20mA, Forward Voltage=3.8V, Lens Color=Colorless, Max Operating Temperature=80°C, Max Power Dissipation=75mW, Min Operating Temperature=-20°C, Package Quantity=1, Power Dissipation=76mW, Reverse Voltage=5V, Case/Package=0603, Depth=1.6mm, Dominant Wavelength=475nm, Height=0.55mm, Illumination Color=Blue, Lead Free="Lead Free", Length=0.8mm, Lens Style=Diffused, Lens Transparency=Clear, Luminous Intensity=180mcd, Mount="Surface Mount", Number Of Elements=1, Number of LEDs=1, Number of Pins=2, Packaging="Tape and Reel", Radiation Hardening=No, Test Current=20mA, Viewing Angle=130°, Wavelength=468nm, Width=0.8mm
F1: library part CMP-08604-000020-1, "FUSE BLOCK CART 250V 6.3A PCB", Fuse Current=6.3A, Manufacturer="Littelfuse Inc", Package=0, Voltage Rating Ac=250V, Automotive=No, Category=Fuse, ComponentLink2Description=Datasheet, ComponentLink2URL=https://www.littelfuse.com/~/media/electronics/datasheets/fuse_blocks/littelfuse_fuse_block_646_datasheet.pdf.pdf, Conn Orientation=Horizontal, Device Class L1="Circuit Protection", Device Class L2="Fuse Holders", Device Class L3=unset, Digikey Description="FUSE BLOCK CART 250V 6.3A PCB", Height=12mm, Lead Free=Yes, Manufacturer Part Number=64600001223, Mouser Description="Fuse Holder Screw Mount Bulk", Number Of Fuses=1, Octopart=https://octopart.com/64600001223-littelfuse-39645661, RoHS=TRUE, Voltage Rating Dc=250V
J1 J2: library part CMP-04776-000649-1, "CONN HEADER VERT 12POS 2.54MM", Color=Natural, Contact Resistance=10mR, Current rating=4A, Flammability Rating="UL94 V-0", Housing Color=White, Insulation Resistance=50GR, Max Operating Temperature=75°C, Min Operating Temperature=0°C, Package Quantity=10, Voltage rating=250V, Connector Type="Male Pin", Contact Gender=Male, Contact material=Brass, Contact Mating Length=0.295inch, Contact Plating=Tin, Contact Type="Male Pin", Depth=5.8mm, Fastening Type=Friction, Gender=Male, Glow Wire Compliant=Non-compliant, Halogen Free="Low Halogen", Height=11.7mm, Hole Diameter=1.02mm, Housing material=Nylon, Lead Free="Lead Free", Lead Pitch=2.54mm, Length=30.48mm, Material=Nylon, Mount="Through Hole", Number of Circuits=12, Number Of Contacts=12, Number of Lines=1, Number of Poles=12, Number of Positions=12, Number Of Rows=1, Orientation=Straight, Packaging=Bulk, Pitch=2.54mm, Radiation Hardening=No, RoHS Compliant=Yes, Series=KK, Termination=Solder, Voltage Rating (AC)=250V, Voltage Rating (DC)=250V, Working Voltage=250V
LS1: library part CMP-06203-000001-2, "AUDIO PIEZO TRANSDUCER 3-15V TH", Frequency=3.6kHz, Max Frequency=4.1kHz, Max Operating Temperature=70°C, Max Supply Current=16mA, Max Supply Voltage=15V, Min Operating Temperature=-20°C, Min Supply Voltage=3V, Nominal Supply Voltage (DC)=12V, Package Quantity=650, Diameter=24.3mm, Height=9.7mm, Lead Free="Lead Free", Length=24.3mm, Max Supply Voltage (DC)=15V, Min Supply Voltage (DC)=3V, Mount=Flush, Nominal Supply Current=16mA, Operating Supply Current=16mA, Packaging=Bulk, Radiation Hardening=No, REACH SVHC="No SVHC", Self Resonant Frequency=3.6kHz, Termination="PC Pins", Voltage rating=12V, Voltage Rating (DC)=15V, Washable=No
MD1: library part CMP-194065-000003-1, "WIFI MODULE 32MBITS SPI FLASH", Manufacturer="Espressif Systems", Max Frequency=2484MHz, Max Supply Voltage=3.6V, Min Supply Voltage=3V, Nominal Supply Current=500mA, Temperature="-40°C to +85°C", Temperature Range High=+85°C, Temperature Range Low=-40°C, Automotive=No, Bandwidth=72MHz, Category=UNK, ComponentLink2Description=Datasheet, ComponentLink2URL=https://www.espressif.com/sites/default/files/documentation/esp32-wroom-32d_esp32-wroom-32u_datasheet_en.pdf, Data Rate=150Mbits/s, Device Class L1="Integrated Circuits (ICs)", Device Class L2="RF Semiconductors and Devices", Device Class L3=Transceivers, Digikey Description="WIFI MODULE 32MBITS SPI FLASH", Height=3.2mm, Interface=I2C,SPI,UART,Ethernet,I2S,Other, Lead Free=Yes, Manufacturer Part Number=ESP32-WROOM-32D, Mouser Description="Wi-Fi/BT BLE Module ESP32-D0WD, SPI Flash, UART, P", Number Of Adc Channels=16, Number Of Gpio=32, Octopart=https://octopart.com/esp32-wroom-32d-espressif+systems-91040050, Package=ESP32-WROOM-32D, RoHS=TRUE, Sensitivity=-98dBm
P1 P2 P3 P5: library part CMP-2000-05826-1, "Male Header, Pitch 3.81 mm, 1 x 2 Position, Height 9.2 mm, Tail Length 3.4 mm", Manufacturer="Phoenix Contact", Package Description="Male Header, Pitch 3.81 mm, 1 x 2 Position, Height 9.2 mm", Package Reference=1803426, Datasheet URL=https://www.phoenixcontact.com/online/portal/cn/pxc/product_detail_page/!ut/p/b1/3VfHjrNIGHyWeQDG5HAkm5zjxQIM2AQDNvnp1zNa7WFX889l5YPpA6L1qUtVdFX3d4gPEYCiFAaBJHgID_Etma9lMl67W9J8fcf4iRJ1HIRRHAIZDANpTKVtR3IFAyUOwSEE0ZNTbb2iOquuOqg8OKsEReRD0XpT8cAJtHK1h62gd5Lwwj7fSR7gfNZiWNE2tu2Xg71pvaHw3VHbDIccysUbixteZxggMWJnxWgP9KIolKko13HrKNI0OD69xjcsLwZb9oJmcNi4flh1xw9LW6-eWTQ9nREGMg82nQ7i5d6Jdk07dw7fZbrokLagaoyYggEvB4C7H5W4HERjSAam7I1pSvC1iqzSu8itk8CidtE6n3bP2nD0Pp6iRD-LQiLob5pFzwLixwIWO7iH0PcgleukhedgldkYbrFLA5WSM7ufG5_qGPkUc9vEzZQaS901mlWkPYn5tWxhabkCUfW4SsSIbpPuMIJHpQReslhERyEnqVrZBIU1V5Nilrs5X123FVtC3BVOSLHMP1b6PfXsNSgk1T-F50SEmtzqQUXqhsW5rwQ1o0BXB2gELrcQ4gCUoNAFTBX6N2LEmxJz0Hclhr8rsXf1mPOuHoPf1WPwu3oMflePSW-7Fd81PGj4i1jqc2r6kGnO3K4b7QxsE14hAduG8C7FaT2GvZ7I-s0j05SGAI1kaO9y99Mt55acg9cLDNYaWwQcdDTPAtjrfMY1OBkOcVEr9HZ8tGspIQLbIVDtpjctgzHFMG4BAZsGvQthBBH4WA-nFo17BJ08nhvnnSIvtClxxDZLZLDt43EXgXAD-FUl6xp1LReX8w3Sb-3dEFiLergsTPmiPWlKHKTnUE9MvjMWis8MoKAxhXcLRQoyR1OjaJFnuS2q9AQSlWi71_PQS1I7hwNcTAR9vGjIY_k4yIf4mrafS9Z-gp_9mn329-4, Datasheet Version=02/2015, Manufacturer URL=http://www.phoenixcontact.com/, Mounting Technology=ThroughHole
P4 P8: library part CMP-2000-05243-1, "Male Header, Pitch 2.54 mm, 1 x 4 Position, Height 11.7 mm, Tail Length 3.56 mm, RoHS, Bulk", Current rating=4A, Manufacturer=Molex, Operating temperature=0degCto+75degC, Voltage rating=250V, Contact material=Tinplatedbrass, Datasheet URL=http://www.molex.com/pdm_docs/sd/022272041_sd.pdf, Datasheet Version="Rev. F, 06/2009", Housing material=Nylon(UL94V-0), Manufacturer URL=http://www.molex.com/
P6 P7 P9 P10 P11: library part CMP-2000-05537-1, "Male Header, Pitch 2.54 mm, 1 x 2 Position, Height 11.7 mm, Tail Length 3.56 mm, 0 to 75 degC, RoHS, Bulk", Current - Max=4A, Manufacturer=Molex, Operating temperature=0°Cto+75°C, Package Description="2-Leads Header, Body 5.08 x 5.8 mm, Pitch 2.54 mm", Package Version="Rev. BC, 02/2012", PartNumber=0022272021, Voltage - Max=250V, Contact material=Tinplatedbrass, Current rating=4A, Datasheet URL=http://www.molex.com/pdm_docs/sd/022272021_sd.pdf, Datasheet Version="Rev. F, 06/2009", Housing material=Nylon(UL94V-0), Manufacturer URL=http://www.molex.com/, Mounting Technology=ThroughHole, No. of Positions=2, No. of Rows=1, Orientation=Vertical, Package Reference=22-27-2021, Pitch=2.54mm, Voltage rating=250V
Q1 Q7 Q8: library part CMP-1048-00779-1, "General Purpose Transistor, NPN Silicon, 3-Pin SOT-23, Pb-Free, Tape and Reel", Manufacturer="On Semiconductor", ComponentLink1Description="Manufacturer URL", ComponentLink1URL=http://www.onsemi.com/, ComponentLink2Description=Datasheet, ComponentLink2URL=http://www.onsemi.cn/pub_link/Collateral/BC846ALT1-D.PDF, ComponentLink3Description="Package Specification", ComponentLink3URL=http://www.onsemi.cn/pub_link/Collateral/318-08.PDF, DatasheetVersion="Rev. 11", fT Min (MHz)=100, IC Continuous (A)=0.1, Mounting Technology="Surface Mount", PackageDescription="3-Pin Small Outline Transistor, Body 2.92 x 1.3 mm, Pitch 0.95 mm", PackageReference=SOT-23-3-318-08, PackageVersion="Rev. AP, 11/2009", Packing="Tape and Reel", PartNumber=BC846BLT1G, Polarity=NPN, RoHS=TRUE
Q2 Q3 Q4 Q9: library part CMP-32901-000149-1, "MOSFET N-CH 40V 202A TO-220AB", Continuous Drain Current=202A, Drain To Source Breakdown Voltage=40V, Drain To Source Resistance=0.0035Ω, Gate To Source Voltage=20V, Input Capacitace At Vds="5669pF @ 25V", Manufacturer="Infineon Technologies", Max Forward Diode Voltage=1.5V, Max Junction Temp=+175°C, Package=PG-TO220-3, Power Dissipation=333W, Pulse Drain Current=808A, Temperature="-55°C to +175°C", Temperature Range Low=-55°C, Automotive=No, Category=Trans, ComponentLink2Description=Datasheet, ComponentLink2URL=https://www.infineon.com/dgdl/irf1404pbf.pdf?fileId=5546d462533600a4015355dae92618b0, Depletion Mode=False, Device Class L1="Discrete Semiconductors", Device Class L2=Transistors, Device Class L3=MOSFETs, Digikey Description="MOSFET N-CH 40V 202A TO-220AB", Drain To Source Voltage=40V, Footprint Url=https://www.infineon.com/dgdl/po-to220ab-fp.pdf?fileId=5546d462580663ef0158068cfbee01be, Gate Charge At Vgs="131nC @ 10V", Height=19.8mm, Lead Free=Yes, Manufacturer Part Number=IRF1404PBF, Number Of Channels=1, Number Of N Channels=1, Octopart=https://octopart.com/irf1404pbf-infineon-65873280, Reverse Recovery Charge=163nC, Reverse Recovery Time=78ns, RoHS=TRUE, Rthja Max=62°C/W, Standoff Height=3.37mm, Temperature Range High=+175°C, Threshold Vgs Max=4V, Threshold Vgs Min=2V, Transconductance=76S, Turn Off Delay Time=46ns, Turn On Delay Time=17ns
Q5 Q6: library part CMP-12798-000025-1, "TRANS PNP 45V 0.5A SOT23", Collector Base Voltage=-50V, Collector Emitter Breakdown Voltage=-45V, Collector Emitter Saturation Voltage=-0.7V, Emitter Base Voltage=-5V, Manufacturer="DIODES INC.", Max Collector Current=-0.5A, Max Junction Temp=+150°C, Package=SOT23, Power Dissipation=310mW, Temperature="-55°C to +150°C", Temperature Range Low=-55°C, Automotive=Yes, Automotive Grade="Grade 0", Category=Trans, Collector Emitter Voltage=-45V, ComponentLink2Description=Datasheet, ComponentLink2URL=https://www.diodes.com/assets/Datasheets/ds11208.pdf, Device Class L1="Discrete Semiconductors", Device Class L2=Transistors, Device Class L3=BJTs, Digikey Description="TRANS PNP 45V 0.5A SOT23", Footprint Url=https://www.diodes.com/assets/Package-Files/SOT23.pdf, Gain Bandwidth Product=100MHz, Height=1.1mm, Hfe Max=600, Hfe Min=250, Hfe Testic=-100mA, Hfe Testvce=-1V, Ipc Land Pattern Name=SOT92P240X102-3, Lead Free=Yes, Manufacturer Part Number=BC807-40-7-F, Mouser Description="Bipolar Transistors - BJT PNP BIPOLAR", Number Of Elements=1, Number Of Pnp=1, Octopart=https://octopart.com/bc807-40-7-f-diodes+inc.-354302, RoHS=TRUE, Rthja Max=403°C/W, Standoff Height=0.013mm, Temperature Range High=+150°C
R1 R4 R5 R11 R14 R16 R17 R18 R19 R20 R22 R23 R24 R29 R31 R32 R34 R36 R38: library part CMP-2001-04908-2, "RES Thick Film, 10kΩ, 1%, 0.125W, 100ppm/°C, 0805", Case Code (Imperial)=0805, Case Code (Metric)=2012, Max Operating Temperature=155°C, Min Operating Temperature=-55°C, Package Quantity=5000, Power Rating=125mW, Resistance=10kR, Temperature Coefficient=100ppm/°C, Tolerance=1%, Voltage rating=150V, Case/Package=0805, Composition="Thick Film", Contact Plating=Tin, Depth=1.25mm, Height=0.45mm, Lead Free="Lead Free", Length=2mm, Military Standard=Not, Packaging="Tape and Reel", Radiation Hardening=No, Termination=SMD/SMT, Voltage Rating (DC)=150V, Weight=0.000194oz, Width=1.25mm
R2 R35 R37: library part CMP-2001-04899-2, "RES Thick Film, 100kΩ, 1%, 0.125W, 100ppm/°C, 0805", Case Code (Imperial)=0805, Case Code (Metric)=2012, Max Operating Temperature=155°C, Min Operating Temperature=-55°C, Package Quantity=5000, Power Rating=125mW, Resistance=100kR, Temperature Coefficient=100ppm/°C, Tolerance=1%, Voltage rating=150V, Case/Package=0805, Composition="Thick Film", Contact Plating=Tin, Depth=1.25mm, Height=0.45mm, Lead Free="Lead Free", Length=2mm, Military Standard=Not, Mount="Surface Mount", Number of Pins=2, Packaging="Tape and Reel", Radiation Hardening=No, Termination=SMD/SMT, Voltage Rating (DC)=150V, Weight=0.000194oz, Width=1.25mm
R3: library part CMP-2100-03615-2, "RES Thick Film, 4.7kΩ, 1%, 0.125W, 100ppm/°C, 0805", Case Code (Imperial)=0805, Case Code (Metric)=2012, Max Operating Temperature=155°C, Max Power Dissipation=125mW, Min Operating Temperature=-55°C, Package Quantity=10, Resistance=4.7kR, Temperature Coefficient=100ppm/°C, Tolerance=1%, Voltage rating=150V, Case/Package=0805, Composition="Thick Film", Contact Plating=Tin, Depth=1.25mm, Features="Automotive AEC-Q200", Height=0.45mm, Lead Free="Lead Free", Length=2mm, Military Standard=Not, Number of Terminations=2, Packaging="Tape and Reel", Power Rating=125mW, Radiation Hardening=No, Termination=SMD/SMT, Voltage Rating (DC)=150V, Weight=0.000194oz, Width=1.25mm
R6 R7 R8 R9: library part CMP-2001-03939-2, "RES Thick Film, 47kΩ, 1%, 0.125W, 100ppm/°C, 0805", Case Code (Imperial)=0805, Case Code (Metric)=2012, Max Operating Temperature=155°C, Max Power Dissipation=125mW, Min Operating Temperature=-55°C, Package Quantity=10, Resistance=47kR, Temperature Coefficient=100ppm/°C, Tolerance=1%, Voltage rating=150V, Case/Package=0805, Composition="Thick Film", Contact Plating=Tin, Depth=1.25mm, Features="Automotive AEC-Q200", Height=0.45mm, Lead Free="Lead Free", Length=2mm, Military Standard=Not, Number of Terminations=2, Packaging="Tape and Reel", Power Rating=125mW, Radiation Hardening=No, Termination=SMD/SMT, Voltage Rating (DC)=150V, Weight=0.000194oz, Width=1.25mm, Working Voltage=150V
R10 R12 R13: library part CMP-2001-03682-2, "RES Thick Film, 220Ω, 1%, 0.125W, 100ppm/°C, 0805", Case Code (Imperial)=0805, Case Code (Metric)=2012, Max Operating Temperature=155°C, Max Power Dissipation=125mW, Min Operating Temperature=-55°C, Package Quantity=10, Resistance=220R, Temperature Coefficient=100ppm/°C, Tolerance=1%, Voltage rating=150V, Case/Package=0805, Composition="Thick Film", Contact Plating=Tin, Depth=1.25mm, Features="Automotive AEC-Q200", Height=0.45mm, Lead Free="Lead Free", Length=2mm, Military Standard=Not, Mount="Surface Mount", Number of Terminations=2, Packaging="Tape and Reel", Power Rating=125mW, Radiation Hardening=No, Termination=SMD/SMT, Voltage Rating (DC)=150V, Weight=0.000194oz, Width=0.049inch
R15: library part CMP-2000-05582-2, "TRIMMER 2K OHM 0.5W PC PIN TOP", Color=Blue, Max Operating Temperature=125°C, Max Power Dissipation=500mW, Min Operating Temperature=-55°C, Package Quantity=50, Resistance=2kR, Resistance Tolerance=10%, Resistor Type=Cermet, Temperature Coefficient=100ppm/°C, Contact Plating=Tin, Depth=4.83mm, Height=0.395inch, Lead Free="Lead Free", Length=9.53mm, Military Standard=Not, Mount=Panel, Number of Turns=25, Packaging=Rail/Tube, Power Rating=500mW, Radiation Hardening=No, REACH SVHC="No SVHC", RoHS Compliant=Yes, Series=3296, Taper=Linear, Technology=CERMET, Termination=Pin, Tolerance=10%, Weight=0.03oz, Width=9.53mm
R21 R25 R26 R27 R28 R40: library part CMP-2001-00581-2, "RES 1K OHM 0.1% 1/8W 0805", Case Code (Imperial)=0805, Case Code (Metric)=2012, Max Operating Temperature=155°C, Max Power Dissipation=125mW, Min Operating Temperature=-55°C, Package Quantity=5000, Resistance=1kR, Resistance Tolerance=0.1%, Resistor Type="Thin Film", Temperature Coefficient=25ppm/°C, Voltage rating=100V, Case/Package=0805, Construction=Rectangular, Contact Plating=Tin, Depth=1.25mm, Height=0.5mm, Length=2mm, Military Standard=Not, Mount="Surface Mount", Number of Pins=2, Number of Terminations=2, Packaging="Tape and Reel", Power Rating=125mW, Radiation Hardening=No, REACH SVHC="No SVHC", RoHS Compliant=Yes, Series=ERA-6A, Technology="THIN FILM", Termination=SMD/SMT, Tolerance=0.1%, Width=1.25mm, Working Voltage=100V
R30 R33: library part CMP-1013-00054-3, "RES SMD 150 OHM 5% 1/8W 0805", Manufacturer=Panasonic, Package=ERJ6GE, Power Rating=0.125W, Resistance=150R, Temperature="-55°C to +155°C", Temperature Coefficient=200ppm/°C, Temperature Range High=+155°C, Temperature Range Low=-55°C, Tolerance=5%, Voltage rating=150V, Automotive=Yes, Automotive Grade="Grade 0", Category=Res, ComponentLink2Description=Datasheet, ComponentLink2URL=https://industrial.panasonic.com/ww/products/resistors/chip-resistors/general-purpose-chip-resistors/thick-film-chip-resistors/ERJ6GEYJ151V, Composition="Thick Film", Device Class L1="Passive Components", Device Class L2=Resistors, Device Class L3="Chip SMD Resistors", Digikey Description="RES SMD 150 OHM 5% 1/8W 0805", Footprint Url=https://industrial.panasonic.com/cdbs/www-data/pdf/RDA0000/DMA0000COL17.pdf, Height=0.7mm, Ipc Land Pattern Name=RESC200125X60, Lead Free=Yes, Manufacturer Part Number=ERJ-6GEYJ151V, Mouser Description="Thick Film Resistors - SMD 0805 150ohms 5% Tol", Octopart=https://octopart.com/erj-6geyj151v-panasonic-55422917, RoHS=TRUE, Series=ERJ
R39: library part CMP-1013-00772-3, "RES Thick Film, 220kΩ, 1%, 0.125W, 100ppm/°C, 0805", Case Code (Imperial)=0805, Case Code (Metric)=2012, Max Operating Temperature=155°C, Max Power Dissipation=125mW, Min Operating Temperature=-55°C, Package Quantity=10, Resistance=220kR, Temperature Coefficient=100ppm/°C, Tolerance=1%, Voltage rating=150V, Case/Package=0805, Composition="Thick Film", Contact Plating=Tin, Depth=1.25mm, Features="Automotive AEC-Q200", Height=0.45mm, Lead Free="Lead Free", Length=2mm, Military Standard=Not, Number of Terminations=2, Packaging="Tape and Reel", Power Rating=125mW, Radiation Hardening=No, Termination=SMD/SMT, Voltage Rating (DC)=150V, Weight=0.000194oz, Width=1.25mm
SD1: library part CMP-2000-05621-1, "Micro SD Connector, Pitch 1.1 mm, 8 Position, Height 1.4 mm, -25 to 85 degC, RoHS, Tape and Reel", Current rating=500mA, Manufacturer=Molex, Package Description="Micro SD Connector, Pitch 1.1 mm, 8 Position, Height 1.4 mm", Voltage rating=10VAC/DC, Brand=Molex, Datasheet URL=http://www.molex.com/pdm_docs/sd/5033981892_sd.pdf, Datasheet Version="Rev. E, 04/2006", Factory Pack Quantity=2400, Manufacturer URL=http://www.molex.com/, Mounting Technology=SurfaceMount, Package Reference=503398-1892, Packaging=Reel, Product Category=MemoryCardConnectors, RoHS=Details, Series=503398
SW1 SW2: library part CMP-08834-000008-1, "SWITCH TACTILE SPST-NO 0.05A 24V", Contact Current Rating=50mA, Contact Resistance=100mR, Max Operating Temperature=70°C, Max Voltage Rating (DC)=24V, Min Operating Temperature=-25°C, Operating Force=1.57N, Package Quantity=1, Ratings=IP67, Actuator Length=0.8mm, Actuator Type=Standard, Contact material=Bronze, Contact Plating=Silver, Current rating=50mA, Depth=9mm, Electrical Life=500000Cycles, Height=3.65mm, Illumination Type=Non-Illuminated, Lead Free="Lead Free", Length=6.6mm, Max Current Rating=50mA, Mechanical Life=500000Cycles, Mount="Surface Mount", Number of Poles=1, Orientation=Straight, Packaging="Tape and Reel", Radiation Hardening=No, REACH SVHC="No SVHC", Switch Function=Off-Mom, Switch Travel=0.25mm, Termination="Gull Wing", Throw Configuration=SPST, Voltage Rating (DC)=24V, Weight=0.010582oz, Width=6mm
U1: library part CMP-0062-01631-4, "800mA Low-Dropout Linear Regulator, 4-pin SOT-223, Pb-Free", Manufacturer="Texas Instruments", PackageTopMarking=XYTT*N05B, PowerWise=N, Code_IPC=SOT223-4, Code_JEDEC=TO-261-AA, ComponentLink1Description="Datasheet URL", ComponentLink1URL=http://www.ti.com/general/docs/lit/getliterature.tsp?genericPartNumber=LM1117-N&fileType=pdf, CompType="LDO IC", High-Reliability=Y, PackageDescription="Molded SOT-223, 6.50 x 3.56 x 1.6mm Body, 4 Lead, 2.3mm Pitch", PackageReference=DCY0004A, PartNumber=LM1117IMP-3.3/NOPB, PinCount=4, RoHS=Y
U2: library part CMP-0062-01635-4, "800mA Low-Dropout Linear Regulator, 4-pin SOT-223, Pb-Free", Manufacturer="Texas Instruments", PackageTopMarking=XYTT*N06A, PowerWise=N, Code_IPC=SOT223-4, Code_JEDEC=TO-261-AA, ComponentLink1Description="Datasheet URL", ComponentLink1URL=http://www.ti.com/general/docs/lit/getliterature.tsp?genericPartNumber=LM1117-N&fileType=pdf, CompType="LDO IC", High-Reliability=Y, PackageDescription="Molded SOT-223, 6.50 x 3.56 x 1.6mm Body, 4 Lead, 2.3mm Pitch", PackageReference=DCY0004A, PartNumber=LM1117MPX-5.0/NOPB, PinCount=4, RoHS=Y

## Free pads (board coordinates)
  round 4 hole 3.5 unplated: 1(3,3.048) 1(3,77) 1(60,40) 1(117,3) 1(117,77)
  rect 1.75x1.75 hole 1.15: 3(14,62.2)
  round 1.75 hole 1.15: 4(14,69.8)

## Via types
v1: diameter 0.7, hole 0.3, Top Layer to Bottom Layer, 50 vias
v2: diameter 1.3, hole 0.7, Top Layer to Bottom Layer, 11 vias
v3: diameter 2, hole 0.7, Top Layer to Bottom Layer, 2 vias

## Nets (pads, with @x,y where several pads share a name; then routed paths per layer and width w, separated by ;. In a path a pad name is that pad's centre, name@x,y a point inside that pad or via, vN(x,y) a via of type N, cw(c..) or ccw(c..) an arc to the next point about the centre after c; other vN are vias at no path point)
+3.3V: C1.1 C6.2 C7.1 C8.2 C9.2 D1.2 MD1.2 P4.2 P4.4 P8.2 P8.4 R3.1 R4.1 R5.1 R6.1 R7.1 R8.1 R9.1 R11.2 R16.2 SD1.4 U1.2 U1.4 | length 276.2
  Top Layer w0.254: P4.4@59.309,75.438 61.352,77.481 66.068,77.481 68.76,74.789 72.757,74.789 72.92,74.952 SD1.4@72.92,75.8
  Top Layer w0.8: P8.2@42.291,75.438 43.795,76.942 45.867,76.942 P8.4@47.371,75.438 48.875,76.942 52.81,76.942 54.229,75.523 P4.2@54.229,75.438 55.733,76.942 57.805,76.942 P4.4@59.309,75.438
  Top Layer w0.9: D1.2@65.377,24.307 65.532,24.152 65.532,24.13 67.656,24.13 C7.1@67.691,24.165 68.297,24.165 69.348,23.114 U1.2@69.773,23.114 U1.4@76.023,23.114 ; C6.2@76.087,16.829 C6.2@76.152,16.764 ; 76.087,20.32 92.348,20.32 93.502,21.474 v1(107.039,21.474) 107.039,18.834 110.43,15.443 R11.2@112.563,15.443 ; 77.754,34.29 R6.1@88.052,34.29 R9.1@88.052,32.385 R8.1@88.052,30.48 ; R3.1@99.568,52.948 99.568,56.471 99.06,56.979 v3(99.06,57.277) 99.123,57.213 103.95,57.213 v2(104.013,57.15) ; R4.1@104.751,27.016 R4.1@104.902,27.016 104.902,26.416 R4.1@105.156,26.67 ; 104.775,26.289 v1(103.505,25.019) 105.421,25.019 ; R5.1@107.569,27.016 107.418,27.016 105.421,25.019 ; v2(109.093,45.466) 109.99,46.363 MD1.2@109.99,48.5 109.99,50.519 C1.1@110.017,50.546 109.982,50.581 109.982,52.771 110.135,52.924 R16.2@110.236,52.924 ; R7.1@109.855,27.219 109.605,27.219 107.405,25.019 105.421,25.019
  Top Layer w2.5: C9.2@75,43.81 77.754,41.056 77.754,34.29 77.754,31.629 76.023,29.898 U1.4@76.023,23.114 76.087,23.05 76.087,20.32 C6.2@76.087,16.829
  Bottom Layer w0.9: v1(103.505,25.019) 107.039,21.485 v1(107.039,21.474) ; v2(104.013,57.15) 104.013,45.993 104.54,45.466 v2(109.093,45.466)
  Bottom Layer w2.5: C8.2@45,43.81 59.309,43.81 ; P4.4@59.309,75.438 59.309,43.81 ; v3(99.06,57.277) 88.011,57.277 81.534,50.8 81.534,50.344 C9.2@75,43.81 59.309,43.81
+5V: C4.1 C5.2 D1.1 D2.2 J2.2 P11.2 U1.3 U2.2 U2.4 | length 77.8
  Top Layer w0.9: D2.2@56.896,20.419 56.924,20.447 58.039,20.447 58.258,20.228 C4.1@58.928,20.228 59.725,19.431 U2.2@61.441,19.431 62.992,19.431 ; D1.1@63.147,24.307 63.147,19.586 62.992,19.431 ; C5.2@67.516,13.081 67.553,13.119 67.553,19.393 U2.4@67.591,19.431 ; P11.2@79.883,4.699 79.883,9.398 74.133,15.148 74.133,16.879 70.198,20.814 U1.3@69.773,20.814 68.974,20.814 68.716,20.556 67.866,20.556 67.591,20.281 U2.4@67.591,19.431 ; 62.992,19.431 U2.4@67.591,19.431
  Bottom Layer w0.9: P11.2@79.883,4.699 81.507,3.075 108.119,3.075 J2.2@109.743,4.699 109.743,4.445 109.737,4.439 J2.2@109.849,4.439